# Altium PCB VideoMuxBoard.PcbDoc (part 2 of 2)
Units mil, origin at the board's own origin, x right, y up, seen from the top; angles counter-clockwise.
Board outline 4724.41 x 4724.41 mil, 4 copper layers (Top Layer, Ground, MidLayer1, Bottom Layer); 247 components, 183 nets, 999 pads, 433 vias.
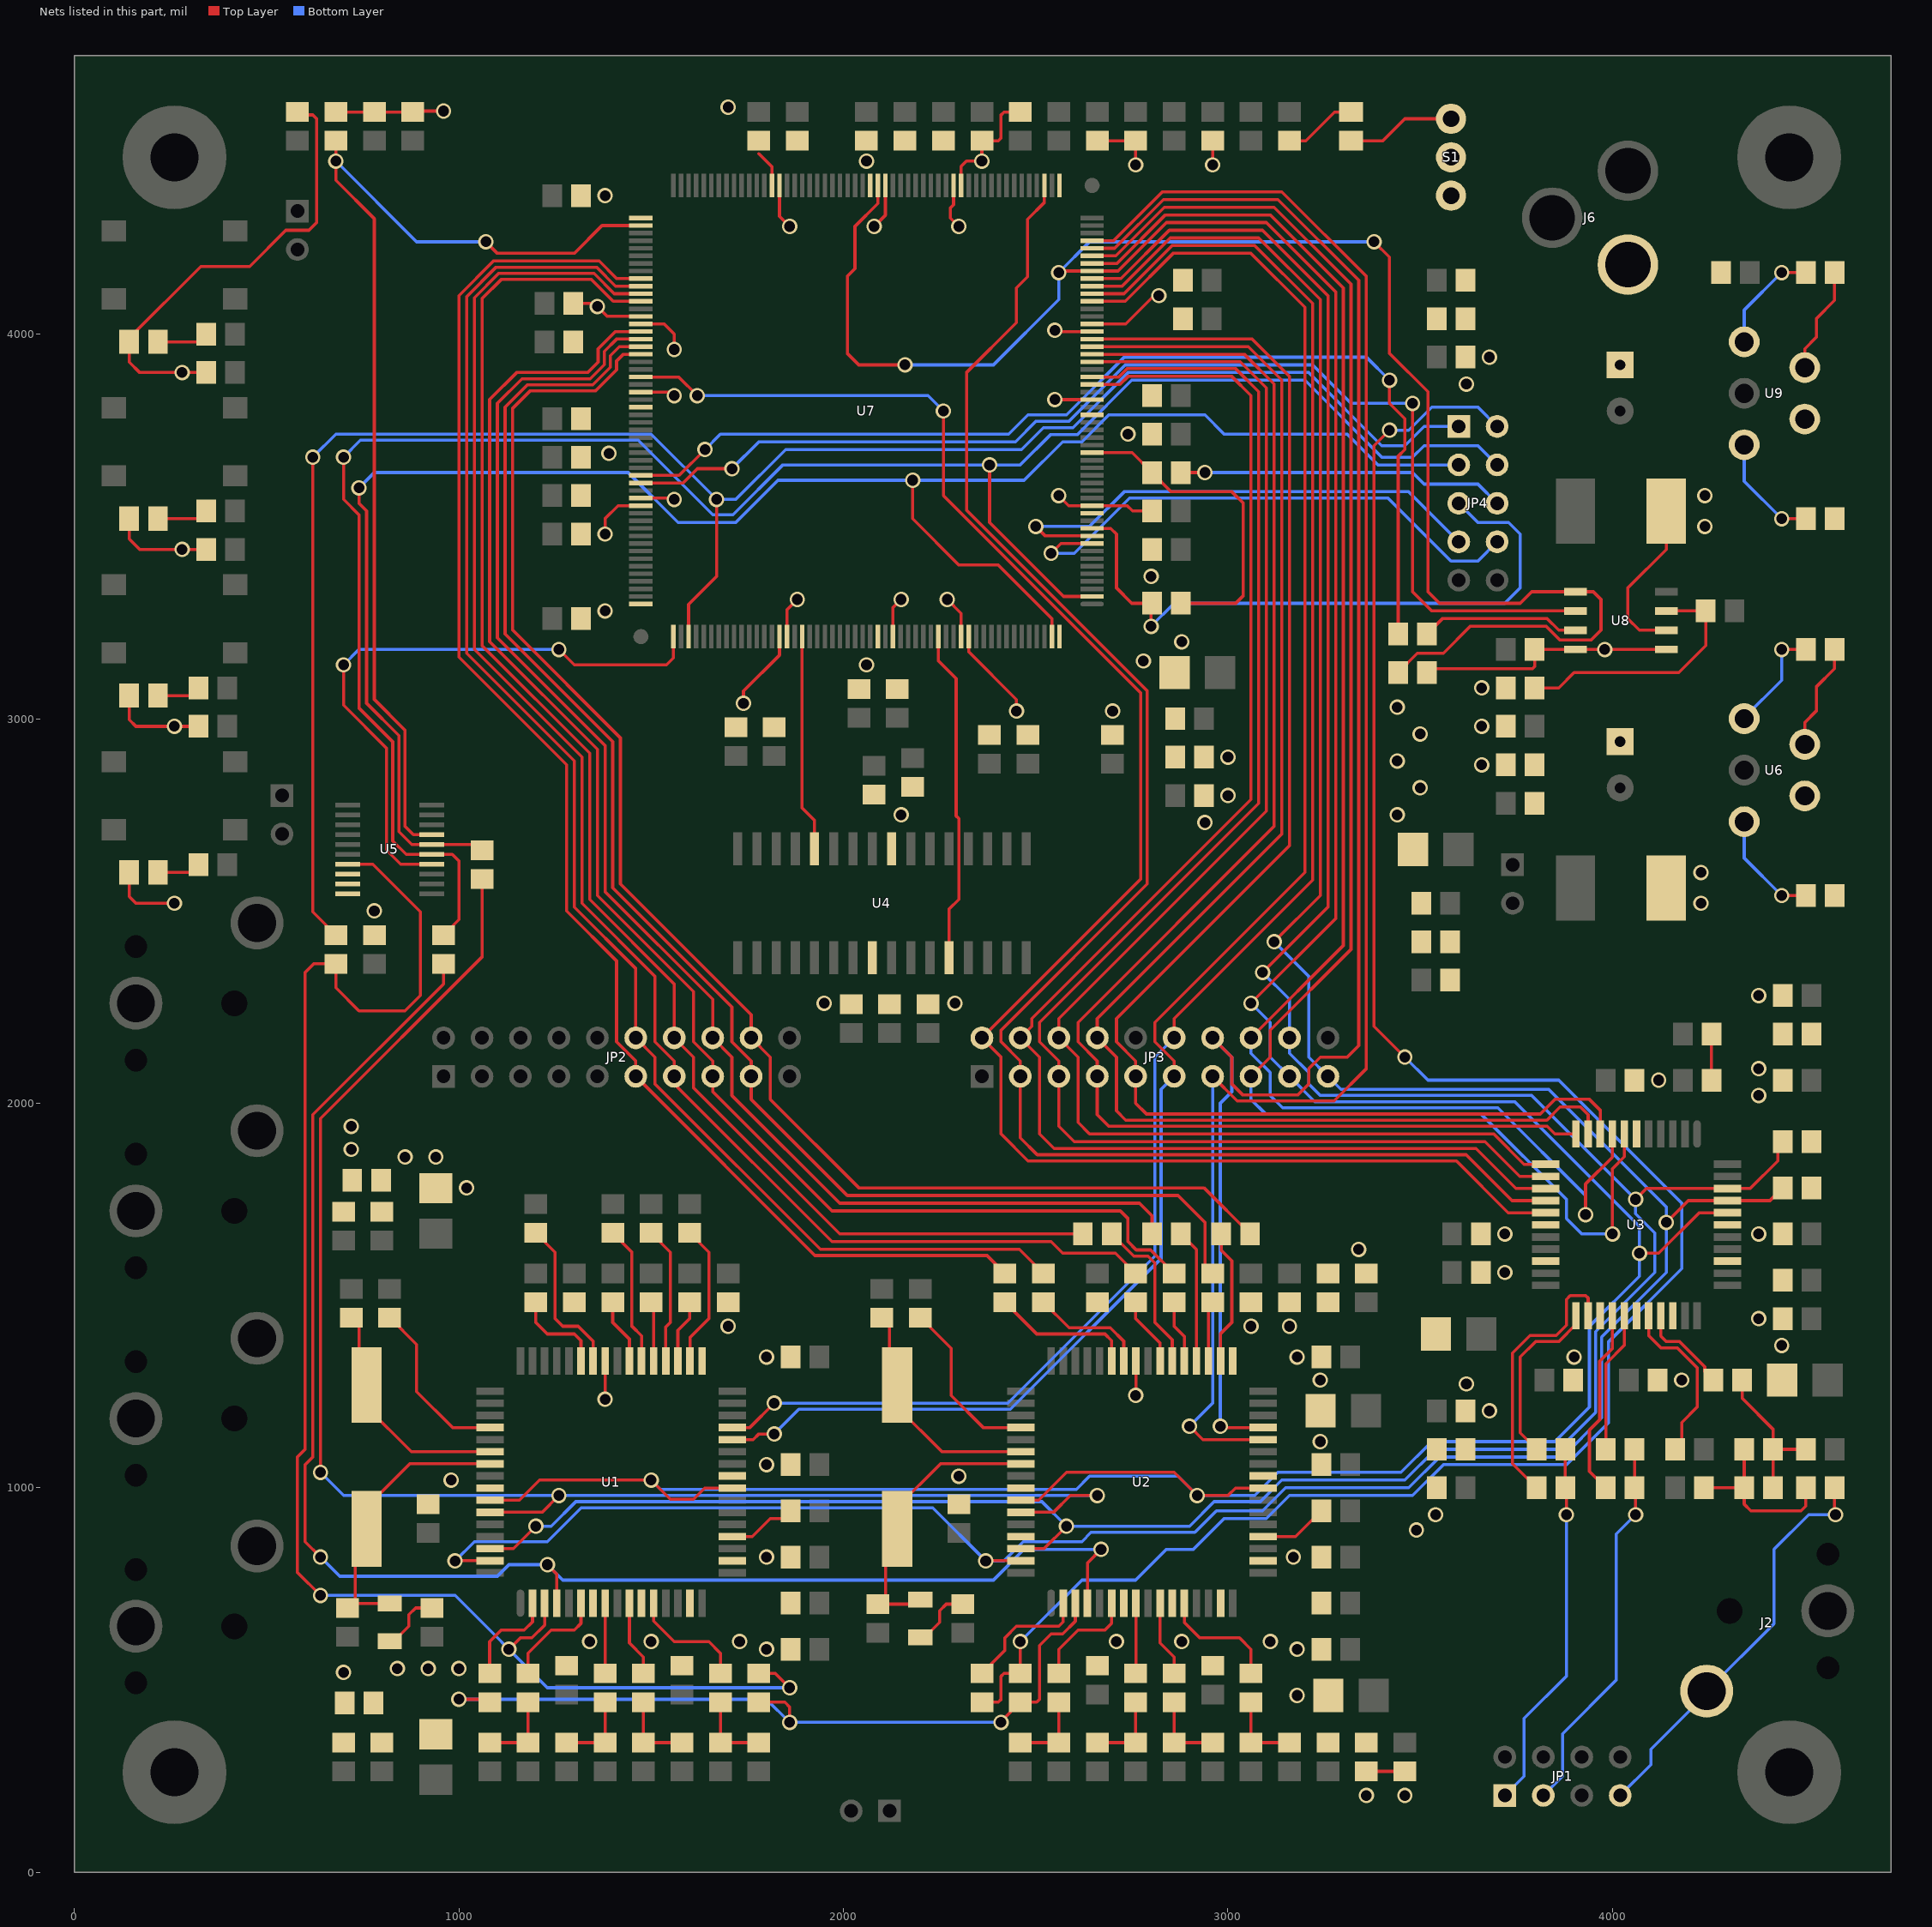
[diagram p4: the nets of this part, all layers, seen from the top]

## Via types
v1: diameter 40, hole 28, Top Layer to Bottom Layer, 433 vias

## Nets (pads, with @x,y where several pads share a name; then routed paths per layer and width w, separated by ;. In a path a pad name is that pad's centre, name@x,y a point inside that pad or via, vN(x,y) a via of type N, cw(c..) or ccw(c..) an arc to the next point about the centre after c; other vN are vias at no path point) (continued)
MPB0: JP2.11 R35.1 U7.113 | length 3922.4
  Top Layer w8: U7.113@1473.36,4144.46 1410,4144.46 1364.46,4190 1090,4190 1000,4100 1000,3160 1280,2880 1280,2500 1410,2370 1410,2160 1460,2110 JP2.11@1460,2070 1926,1604 2373.4,1604 R35.1@2420,1557.4
MPB1: JP2.12 R36.1 U7.114 | length 3969.9
  Top Layer w8: U7.114@1473.36,4124.78 1407.06,4124.78 1357.84,4174 1096.63,4174 1020,4097.37 1020,3170 1300,2890 1300,2510 1460,2350 JP2.12@1460,2170 1510,2120 1510,2050 1940,1620 2457.4,1620 R36.1@2520,1557.4
MPB2: JP2.13 R37.1 U7.115 | length 4150.9
  Top Layer w8: U7.115@1473.36,4105.09 1404.12,4105.09 1351.21,4158 1103.25,4158 1040,4094.75 1040,3180 1320,2900 1320,2520 1510,2330 1510,2160 1560,2110 JP2.13@1560,2070 ; JP2.13@1565.25,2070 JP2.13@1560,2070 ; R37.1@2760,1557.4 2707.4,1610 2570,1610 2540,1640 1970,1640 1560,2050 JP2.13@1560,2070
MPB3: JP2.14 R44.1 U7.116 | length 3907.4
  Top Layer w8: U7.116@1473.36,4085.41 1401.17,4085.41 1344.58,4142 1109.88,4142 1060,4092.12 1060,3190 1340,2910 1340,2530 1560,2310 JP2.14@1560,2170 1610,2120 1610,2040 1990,1660 R44.1@2622.6,1660
MPB4: JP2.15 R38.1 U7.120 | length 3958
  Top Layer w8: U7.120@1473.36,4006.67 1406.67,4006.67 1362,3962 1362,3927.25 1334.75,3900 1150,3900 1080,3830 1080,3200 1360,2920 1360,2540 1610,2290 1610,2160 1660,2110 JP2.15@1660,2070 1660,2030 1970,1720 2720,1720 2740,1700 2740,1640.03 2761.56,1618.47 2798.93,1618.47 R38.1@2860,1557.4
MPB5: JP2.16 R45.1 U7.121 | length 3784.8
  Top Layer w8: U7.121@1473.36,3986.98 1410,3986.98 1378,3954.98 1378,3920.63 1341.37,3884 1164,3884 1100,3820 1100,3210 1380,2930 1380,2550 1660,2270 JP2.16@1660,2170 1710,2120 1710,2020 1990,1740 2770,1740 2802.6,1707.4 R45.1@2802.6,1660
MPB6: JP2.17 R39.1 U7.122 | length 3954.6
  Top Layer w8: U7.122@1473.36,3967.3 1417.3,3967.3 1394,3944 1394,3914 1348,3868 1178,3868 1120,3810 1120,3220 1400,2940 1400,2560 1710,2250 1710,2160 1760,2110 JP2.17@1760,2070 1760,2010 2010,1760 2870,1760 2940,1690 2940,1577.4 R39.1@2960,1557.4
MPB7: JP2.18 R46.1 U7.123 | length 3872.4
  Top Layer w8: 1354.63,3853.44 1354.63,3852 1184.63,3852 1140,3807.37 1140,3230 1420,2950 1420,2570 1760,2230 JP2.18@1760,2170 1810,2120 1810,2010 2040,1780 2937.4,1780 R46.1@3057.4,1660 ; 1355.35,3852.72 1410,3907.37 1410,3930 1427.61,3947.61 U7.123@1473.36,3947.61
MPOUT0: JP3.2 U3.16 U7.126 | length 4609.1
  Top Layer w8: U7.126@1473.36,3888.56 1571.44,3888.56 v1(1620,3840) ; v1(2260,3800) 2260,3580 2773.5,3066.5 2773.5,2583.5 JP3.2@2360,2170 2410,2120 2410,1920 2480,1850 3594.14,1850 3728.87,1715.28 U3.16@3826.3,1715.27
  Bottom Layer w8: v1(1620,3840) 2220,3840 v1(2260,3800)
MPOUT1: JP3.3 U3.15 U7.55 | length 4367.2
  Top Layer w8: U7.55@2522.57,4386.59 2522.58,4342.58 2478.76,4298.76 2478.76,4148.76 2450,4120 2450,4030 2320,3900 2320,3542.63 2790,3072.63 2790,2570 2410,2190 2410,2160 2460,2110 JP3.3@2460,2070 2460,1910 2504,1866 3619.64,1866 3738.87,1746.77 U3.15@3826.3,1746.77
MPOUT2: JP3.4 U3.14 U7.30 | length 4007.1
  Top Layer w8: U7.30@2646.59,3868.87 2718.87,3868.87 2740,3890 3010,3890 3060,3840 3060,2790 2490,2220 2490,2200 JP3.4@2460,2170 2510,2120 2510,1920 2548,1882 3645.14,1882 3748.87,1778.27 U3.14@3826.3,1778.27
MPOUT3: JP3.5 U3.13 U7.31 | length 3954.2
  Top Layer w8: U7.31@2646.59,3888.56 2715.93,3888.56 2737.37,3910 3020,3910 3080,3850 3080,2780 2510,2210 2510,2160 2560,2110 JP3.5@2560,2070 2560,1940 2600,1900 3668.63,1900 3758.87,1809.76 U3.13@3826.3,1809.76
MPOUT4: JP3.6 U3.12 U7.33 | length 3897.3
  Top Layer w8: U7.33@2646.59,3927.93 3032.07,3927.93 3100,3860 3100,2760 2560,2220 JP3.6@2560,2170 2610,2120 2610,1950 2640,1920 3691.26,1920 3770,1841.26 U3.12@3826.3,1841.26
MPOUT5: JP3.7 U3.11 U7.34 | length 3903.3
  Top Layer w8: U7.34@2646.59,3947.61 3042.39,3947.61 3120,3870 3120,2720 2610,2210 2610,2160 2660,2110 JP3.7@2660,2070 2660,1970 2690,1940 3830,1940 3850,1920 U3.11@3905.04,1920
MPOUT6: JP3.8 U3.10 U7.35 | length 3957.9
  Top Layer w8: U7.35@2646.59,3967.3 3052.7,3967.3 3140,3880 3140,2700 2660,2220 JP3.8@2660,2170 2710,2120 2710,1980 2734,1956 3829.48,1956 3863.48,1990 3916.54,1990 3936.54,1970 U3.10@3936.53,1920
MPOUT7: JP3.9 U3.9 U7.36 | length 3959.6
  Top Layer w8: U7.36@2646.59,3986.98 3063.02,3986.98 3160,3890 3160,2670 2710,2220 2710,2160 2760,2110 JP3.9@2760,2070 2760,2000 2788,1972 3812,1972 3850,2010 3940,2010 3968.03,1981.97 U3.9@3968.03,1920
NetC3_1: C3.1 R9.2 R11.2 | length 205.2
  Top Layer w8: R9.2@2460,337.4 R11.2@2560,337.4 C3.1@2560,442.6
NetC3_2: C3.2 U2.6 | length 280.5
  Top Layer w8: C3.2@2560,517.4 2560,580 2610,630 2680,630 2697.48,647.48 U2.6@2697.48,700
NetC5_1: C5.1 R12.2 R13.2 | length 205.2
  Top Layer w8: R12.2@2660,337.4 R13.2@2760,337.4 C5.1@2760,442.6
NetC5_2: C5.2 U2.8 | length 182.8
  Top Layer w8: C5.2@2760,517.4 2760.47,517.88 U2.8@2760.47,700
NetC6_1: C6.1 R14.2 R15.2 | length 205.2
  Top Layer w8: C6.1@2860,442.6 R14.2@2860,337.4 R15.2@2960,337.4
NetC6_2: C6.2 U2.10 | length 197.7
  Top Layer w8: U2.10@2823.47,700 2823.46,596.54 2860,560 C6.2@2860,517.4
NetC8_1: C8.1 R16.2 R17.2 | length 205.2
  Top Layer w8: C8.1@3060,442.6 R16.2@3060,337.4 R17.2@3160,337.4
NetC8_2: C8.2 U2.12 | length 315.1
  Top Layer w8: U2.12@2886.46,700 2886.46,650 2926.46,610 3030,610 3060,580 C8.2@3060,517.4
NetC12_1: C12.1 R1.2 R2.2 | length 205.2
  Top Layer w8: R1.2@1080,337.4 R2.2@1180,337.4 C12.1@1180,442.6
NetC12_2: C12.2 U1.6 | length 274.7
  Top Layer w8: C12.2@1180,517.4 1180,570 1240,630 1300,630 1317.48,647.48 U1.6@1317.48,700
NetC14_1: C14.1 R3.2 R4.2 | length 205.2
  Top Layer w8: R3.2@1280,337.4 R4.2@1380,337.4 C14.1@1380,442.6
NetC14_2: C14.2 U1.8 | length 182.1
  Top Layer w8: C14.2@1380.47,517.88 U1.8@1380.47,700
NetC15_1: C15.1 R5.2 R6.2 | length 205.2
  Top Layer w8: C15.1@1480,442.6 R5.2@1480,337.4 R6.2@1580,337.4
NetC15_2: C15.2 U1.10 | length 197.7
  Top Layer w8: U1.10@1443.47,700 1443.46,596.54 1480,560 C15.2@1480,517.4
NetC17_1: C17.1 R7.2 R8.2 | length 205.2
  Top Layer w8: C17.1@1680,442.6 R7.2@1680,337.4 R8.2@1780,337.4
NetC17_2: C17.2 U1.12 | length 307.2
  Top Layer w8: U1.12@1506.46,700 1506.46,653.54 1560,600 1650,600 1680,570 C17.2@1680,517.4
NetC20_2: C20.2 L4.2 U2.55 X2.1 | length 755.9
  Top Layer w8: L4.2@2200,709.21 2188.19,697.4 C20.2@2090,697.4 2110,717.4 2110,862.99 X2.1@2140,892.99 2140,950 2252.2,1062.2 U2.55@2461.26,1062.2
NetC21_2: C21.2 L4.1 | length 163.5
  Top Layer w8: L4.1@2200,610.79 2210.79,610.79 2250,650 2250,680 2267.4,697.4 C21.2@2310,697.4
NetC22_2: C22.2 L3.2 U1.55 X1.1 | length 749.2
  Top Layer w8: C22.2@710,687.4 C22.2@721.81,699.21 ; L3.2@820,699.21 C22.2@721.81,699.21 ; U1.55@1081.26,1062.2 872.2,1062.2 760,950 X1.1@760,892.99 730,862.99 730,707.4 C22.2@721.81,699.21
NetC23_2: C23.2 L3.1 | length 163.5
  Top Layer w8: L3.1@820,600.79 830.79,600.79 870,640 870,670 887.4,687.4 C23.2@930,687.4
NetC33_1: C33.1 C34.2 L5.1 L7.2 | length 467.6
  Top Layer w8: C33.1@4237.4,1000 C34.2@4342.6,1000 ; L7.2@4342.6,1100 C34.2@4342.6,1000 ; L5.1@4502.6,1000 4502.6,952.6 4490,940 4360,940 4342.6,957.4 C34.2@4342.6,1000
NetC42_1: C42.1 U1.54 X1.2 | length 618.6
  Top Layer w8: C42.1@720,1442.6 740,1422.6 740,1287.01 X1.2@760,1267.01 760,1210 876.3,1093.7 U1.54@1081.26,1093.7
NetC49_1: C49.1 U2.54 X2.2 | length 618.6
  Top Layer w8: C49.1@2100,1442.6 2120,1422.6 2120,1287.01 X2.2@2140,1267.01 2140,1210 2256.3,1093.7 U2.54@2461.26,1093.7
NetC67_1: C67.1 R49.2 | length 120
  Top Layer w8: R49.2@4257.4,2060 C67.1@4257.4,2180
NetC79_1: C79.1 C80.1 L13.2 R60.2 U6.2 | length 279
  Top Layer w8: U6.2@4500,2933.07 4500,2990 4530,3020 4530,3082.6 4577.4,3130 R60.2@4577.4,3180
NetC96_1: C96.1 C106.1 L14.2 R69.2 U9.2 | length 279
  Top Layer w8: U9.2@4500,3913.07 4500,3962 4530,3992 4530,4040 4577.4,4087.4 R69.2@4577.4,4160
NetJ2_1: J2.1 JP1.7 L5.2 | length 1070.4
  Top Layer w8: v1@4577.4,932.6 L5.2@4577.4,1000
  Bottom Layer w8: JP1.7@4020,200 4100,280 4100,320 4245.04,465.04 J2.1@4245.04,471.34 4420,646.3 4420,840 4510,930 v1(4580,930)
NetJP4_6: JP4.6 R66.2 | length 855.7
  Top Layer w8: R66.2@2877.4,3640 v1(2940,3640)
  Bottom Layer w8: v1(2940,3640) 3480,3640 3510,3610 3650,3610 JP4.6@3700,3560
NetLED1_2: LED1.2 R53.1 | length 113.5
  Top Layer w8: LED1.2@217.4,2600 302.6,2600 R53.1@322.6,2620
NetLED2_2: LED2.2 R56.1 | length 113.5
  Top Layer w8: LED2.2@217.4,3060 302.6,3060 R56.1@322.6,3080
NetLED3_2: LED3.2 R65.1 | length 133.5
  Top Layer w8: LED3.2@217.4,3520 322.6,3520 R65.1@342.6,3540
NetLED4_2: LED4.2 R68.1 | length 133.5
  Top Layer w8: LED4.2@217.4,3980 322.6,3980 R68.1@342.6,4000
NetLED5_2: LED5.2 R77.1 | length 191
  Top Layer w8: R77.1@3160,4502.6 3202.6,4502.6 3277.4,4577.4 LED5.2@3320,4577.4
NetR18_2: R19.2 U2.2 | length 334.6
  Top Layer w8: R19.2@2360,517.4 2420,577.4 2420,610 2450,640 2560,640 2571.5,651.5 U2.2@2571.5,700
NetR19_2: R18.2 U1.2 | length 263.9
  Top Layer w8: R18.2@1080,517.4 1080,600 1110,630 1170,630 1191.5,651.5 U1.2@1191.5,700
NetR21_2: R21.2 U1.20 | length 179.1
  Top Layer w8: U1.20@1711.18,873.23 1763.23,873.23 1810,920 1842.6,920 R21.2@1862.6,940
NetR22_2: R22.2 U2.20 | length 179.1
  Top Layer w8: U2.20@3091.18,873.23 3175.83,873.23 R22.2@3242.6,940
NetR23_1: R23.1 U3.24 | length 722.8
  Top Layer w8: R23.1@3802.6,1000 3740,1062.6 3740,1350 3785.87,1395.87 3853.42,1395.87 3880,1422.45 3880,1490 3890,1500 3930,1500 3936.53,1493.47 U3.24@3936.53,1447.56
NetR24_1: R24.1 U3.26 | length 489.9
  Top Layer w8: R24.1@3982.6,1000 3940,1042.6 3940,1150 3966.72,1176.72 3966.72,1329.17 3999.53,1361.98 U3.26@3999.53,1447.56
NetR25_1: R25.1 U3.23 | length 460.4
  Top Layer w8: R25.1@3802.6,1100 3760,1142.6 3760,1340 3800,1380 3860,1380 3905.04,1425.04 U3.23@3905.04,1447.56
NetR26_1: R26.1 U3.27 | length 367.6
  Top Layer w8: R26.1@3982.6,1100 3982.6,1322.6 4031.02,1371.02 U3.27@4031.02,1447.56
NetR27_1: R27.1 U3.29 | length 448.4
  Top Layer w8: U3.29@4094.02,1447.56 4094.02,1395.98 4125.87,1364.13 4168.32,1364.13 4220,1312.45 4220,1210 4180,1170 4180,1117.4 R27.1@4162.6,1100
NetR28_1: R28.1 U3.30 | length 244.8
  Top Layer w8: U3.30@4125.51,1447.56 4125.51,1394.49 4140,1380 4174.9,1380 4240,1314.9 4240,1302.6 R28.1@4262.6,1280
NetR29_2: R29.2 U1.52 | length 451.5
  Top Layer w8: R29.2@820,1442.6 890,1372.6 890,1250 983.31,1156.69 U1.52@1081.26,1156.69
NetR30_2: R30.2 U1.43 | length 242.3
  Top Layer w8: R30.2@1200,1482.6 1200,1430 1230,1400 1300,1400 1317.48,1382.52 U1.43@1317.48,1329.92
NetR31_2: R31.2 U1.39 | length 170.7
  Top Layer w8: R31.2@1400,1482.6 1400,1430 1443.46,1386.54 U1.39@1443.47,1329.92
NetR32_2: R32.2 U1.37 | length 155.4
  Top Layer w8: R32.2@1500,1482.6 1506.46,1476.14 U1.37@1506.46,1329.92
NetR33_2: R33.2 U1.35 | length 165.3
  Top Layer w8: U1.35@1569.45,1329.92 1569.45,1409.45 1600,1440 R33.2@1600,1482.6
NetR34_2: R34.2 U2.52 | length 451.5
  Top Layer w8: R34.2@2200,1442.6 2280,1362.6 2280,1240 2363.31,1156.69 U2.52@2461.26,1156.69
NetR35_2: R35.2 U2.43 | length 371.5
  Top Layer w8: R35.2@2420,1482.6 2502.6,1400 2680,1400 2697.48,1382.52 U2.43@2697.48,1329.92
NetR36_2: R36.2 U2.42 | length 302.2
  Top Layer w8: R36.2@2520,1482.6 2586.6,1416 2694,1416 2728.98,1381.02 U2.42@2728.98,1329.92
NetR37_2: R37.2 U2.39 | length 179
  Top Layer w8: R37.2@2760,1482.6 2760,1440 2823.46,1376.54 U2.39@2823.47,1329.92
NetR38_2: R38.2 U2.37 | length 163.6
  Top Layer w8: R38.2@2860,1482.6 2860,1420 2886.46,1393.54 U2.37@2886.46,1329.92
NetR39_2: R39.2 U2.35 | length 157
  Top Layer w8: U2.35@2949.45,1329.92 2949.45,1472.05 R39.2@2960,1482.6
NetR40_2: R40.2 U1.42 | length 417.8
  Top Layer w8: R40.2@1200,1662.6 1250,1612.6 1250,1440 1270,1420 1310,1420 1348.98,1381.02 U1.42@1348.98,1329.92
NetR41_2: R41.2 U1.38 | length 363.7
  Top Layer w8: R41.2@1400,1662.6 1450,1612.6 1450,1420 1474.96,1395.04 U1.38@1474.96,1329.92
NetR42_2: R42.2 U1.36 | length 358.4
  Top Layer w8: R42.2@1500,1662.6 1550,1612.6 1550,1430 1537.95,1417.95 U1.36@1537.95,1329.92
NetR43_2: R43.2 U1.34 | length 373.7
  Top Layer w8: R43.2@1600,1662.6 1650,1612.6 1650,1440 1600.95,1390.94 U1.34@1600.95,1329.92
NetR44_2: R44.2 U2.38 | length 417.2
  Top Layer w8: R44.2@2697.4,1660 2754.93,1602.47 2792.3,1602.47 2810,1584.77 2810,1430 2854.96,1385.04 U2.38@2854.96,1329.92
NetR45_2: R45.2 U2.36 | length 346.9
  Top Layer w8: R45.2@2877.4,1660 2917.95,1619.45 U2.36@2917.95,1329.92
NetR46_2: R46.2 U2.34 | length 353.5
  Top Layer w8: U2.34@2980.94,1329.92 2980.94,1400.94 3010,1430 3010,1590 2982.6,1617.4 R46.2@2982.6,1660
NetR52_1: R52.1 U6.5 | length 295.3
  Top Layer w8: v1(4440,2540) R52.1@4502.6,2540
  Bottom Layer w8: U6.5@4342.52,2732.28 4342.52,2637.48 v1(4440,2540)
NetR58_2: R58.2 R62.1 U8.3 | length 683.4
  Top Layer w8: R58.2@3797.4,3080 3860,3080 3900,3120 4172.6,3120 4242.6,3190 R62.1@4242.6,3280 U8.3@4140,3280
NetR59_2: R59.2 U8.7 | length 415.4
  Top Layer w8: R59.2@3517.4,3220 3557.4,3260 3830,3260 3860,3230 U8.7@3903.78,3230
NetR60_1: R60.1 U6.1 | length 286.5
  Top Layer w8: v1(4440,3180) R60.1@4502.6,3180
  Bottom Layer w8: U6.1@4340,3000 4341.26,3001.26 U6.1@4342.52,3002.52 ; U6.1@4342.52,3000 U6.1@4342.52,3002.52 ; v1(4440,3180) 4440,3100 U6.1@4342.52,3002.52
NetR64_1: R64.1 U9.5 | length 295.3
  Top Layer w8: v1(4440,3520) R64.1@4502.6,3520
  Bottom Layer w8: U9.5@4342.52,3712.28 4342.52,3617.48 v1(4440,3520)
NetR69_1: R69.1 U9.1 | length 283
  Top Layer w8: v1(4440,4160) R69.1@4502.6,4160
  Bottom Layer w8: U9.1@4342.52,3980 4342.52,4062.52 v1(4440,4160)
OEBAR: U4.28 U7.174 | length 565
  Top Layer w8: U7.174@1892.65,3213.36 1892.65,2767.35 1925,2735 U4.28@1925,2661.73
POS1_8V: C78.1 C92.1 L12.1 R64.2 U8.2 U9.4 | length 433.8
  Top Layer w8: U8.2@4140,3230 4070,3230 4040,3260 4040,3340 4140,3440 C92.1@4140,3540
  other v1: 2940,2730 3000,2800 3000,2900 4240,3500 4240,3580
POS3_3V: C10.1 C11.1 C32.1 C53.1 C56.1 C68.1 C69.1 C71.1 C88.1 L1.1 L2.1 L6.1 L8.1 L9.1 L10.1 L11.1 LED1.1 LED2.1 LED3.1 LED4.1 R52.2 R55.1 R57.2 R63.1 R67.1 R78.1 U6.4 U8.1 U8.8 | length 2687.4
  Top Layer w8: LED1.1@142.6,2600 142.6,2537.4 160,2520 v1(260,2520) ; LED2.1@142.6,3060 142.6,2997.4 160,2980 v1(260,2980) R55.1@322.6,2980 ; LED3.1@142.6,3520 142.6,3467.4 170,3440 v1(280,3440) R63.1@342.6,3440 ; R67.1@342.6,3900 v1(280,3900) 170,3900 142.6,3927.4 LED4.1@142.6,3980 142.6,3990 328.6,4176 456,4176 550,4270 610,4270 630,4290 630,4560 620,4570 587.4,4570 R78.1@580,4577.4 ; L1.1@3360,262.6 C10.1@3460,262.6 ; R57.2@3517.4,3120 3527.4,3130 3792,3130 3797.4,3135.4 C88.1@3797.4,3180 U8.8@3903.78,3180 v1(3980,3180) U8.1@4140,3180
  other v1: 3360,200 3460,200 700,520 3490,890 3540,930 3340,1620 720,1880 720,1940 4380,2280 4230,2520 4230,2600
POS5V: C86.1 C101.1 L13.1 L14.1 LED5.1 R58.1 S1.3 | length 283.8
  Top Layer w8: LED5.1@3320,4502.6 3402.6,4502.6 3460,4560 S1.3@3580,4560
  other v1: 3660,2880 3660,2980 3660,3080 3620,3870 3680,3940
PROGRAM: R70.2 U5.7 U7.106 | length 2858.1
  Top Layer w8: R70.2@680,4502.6 v1(680,4450) 680,4400 780,4300 780,3050 860,2970 860,2720 881.61,2698.39 U5.7@929.25,2698.39 ; v1(1070,4240) 1100,4210 1300,4210 1372.26,4282.26 U7.106@1473.36,4282.26
  Bottom Layer w8: v1(680,4450) 890,4240 v1(1070,4240)
PWR_IN: C104.1 J6.1 S1.1 S1.2 | length 29.2
  Top Layer w40: J6.1@4040,4180.63 J6.1@4060.63,4160
PWRGOOD: U7.140 U8.6 | length 3109.7
  Top Layer w8: U7.140@1473.36,3612.97 1582.97,3612.97 1620,3650 v1(1710,3650) ; v1(3480,3820) 3480,3330 3530,3280 U8.6@3903.78,3280
  Bottom Layer w8: v1(1710,3650) 1780,3720 2447.18,3720 2500,3772.82 2585.45,3772.82 2732.63,3920 3220,3920 3320,3820 v1(3480,3820)
RCV1: JP3.15 U3.7 U7.47 | length 4423.5
  Top Layer w8: U7.47@2646.59,4203.52 2708.26,4203.52 2834.74,4330 3120,4330 3320,4130 3320,2400 3110,2190 3110,2120 JP3.15@3060,2070 ; v1(4000,1660) 4000,1830 4031.02,1861.02 U3.7@4031.02,1920
  Bottom Layer w8: JP3.15@3060,2070 3060,2010 3098,1972 3658,1972 3880,1750 3880,1700 3920,1660 v1(4000,1660)
RCV2: JP3.16 U3.8 U7.46 | length 4221
  Top Layer w8: U7.46@2646.59,4183.83 2711.21,4183.83 2837.37,4310 3110,4310 3300,4120 3300,2410 JP3.16@3060,2170 ; v1(3930,1710) 3930,1790 3999.53,1859.53 U3.8@3999.53,1920
  Bottom Layer w8: JP3.16@3060,2170 3060,2130 3110,2080 3110,2020 3142,1988 3702,1988 3930,1760 v1(3930,1710)
RESETBAR: JP3.17 R57.1 U1.24 U1.58 U2.24 U2.58 U3.40 U7.45 U7.77 U8.5 | length 13004.3
  Top Layer w8: U1.58@1081.26,967.72 1157.72,967.72 1210,1020 v1(1500,1020) 1550,970 1610,970 1639.21,999.21 U1.24@1711.18,999.21 ; U7.77@2089.5,4386.59 2089.5,4339.5 2030,4280 2030,4170 2010,4150 2010,3950 2040,3920 v1(2160,3920) ; U2.58@2461.26,967.72 2507.72,967.72 2580,1040 2860,1040 v1(2920,980) 3000,980 3019.21,999.21 U2.24@3091.18,999.21 ; v1(2560,4160) 2564.15,4164.15 U7.45@2646.59,4164.15 2714.15,4164.15 2840,4290 3100,4290 3280,4110 3280,2480 v1(3060,2260) ; v1(3380,4240) 3420,4200 3420,3950 3520,3850 3520,3330 3550,3300 3760,3300 3790,3330 U8.5@3903.78,3330 3950,3330 3970,3310 3970,3230 3945,3205 3862.55,3205 3827.55,3240 3630,3240 3560,3170 3492.6,3170 R57.1@3442.6,3120 ; v1(4070,1610) 4120,1610 4225.27,1715.27 U3.40@4298.74,1715.27
  Bottom Layer w8: v1(1500,1020) 1524,996 2606,996 2640,1030 2870,1030 v1(2920,980) 3070,980 3130,1040 3450,1040 3530,1120 3850,1120 3940,1210 3940,1420 4070,1550 v1(4070,1610) 4070,1680 3746,2004 3226,2004 JP3.17@3160,2070 3110,2120 3110,2210 v1(3060,2260) ; v1(2160,3920) 2390,3920 2560,4090 v1(2560,4160) 2640,4240 v1(3380,4240)
RTSA0: JP3.11 U1.28 U7.41 | length 4643.2
  Top Layer w8: U1.28@1711.18,1125.2 1765.2,1125.2 1780,1140 v1(1820,1140) ; U7.41@2646.59,4085.41 2732.78,4085.41 2857.37,4210 3060,4210 3200,4070 3200,2600 2810,2210 2810,2160 2860,2110 JP3.11@2860,2070
  Bottom Layer w8: v1(1820,1140) 1884,1204 2434,1204 2826,1596 2826,2036 JP3.11@2860,2070
RTSA1: JP3.12 U1.29 U7.42 | length 4618
  Top Layer w8: U1.29@1711.18,1156.69 1756.69,1156.69 v1(1820,1220) ; U7.42@2646.59,4105.09 2729.84,4105.09 2854.75,4230 3070,4230 3220,4080 3220,2580 2860,2220 JP3.12@2860,2170
  Bottom Layer w8: v1(1820,1220) 2427.37,1220 2810,1602.63 2810,2120 JP3.12@2860,2170
RTSB0: JP3.13 U2.28 U7.49 | length 4518.9
  Top Layer w8: U7.49@2646.59,4242.89 2702.38,4242.89 2829.49,4370 3140,4370 3360,4150 3360,2090 3276,2006 3024,2006 JP3.13@2960,2070 ; v1(2900,1160) 2934.8,1125.2 U2.28@3091.18,1125.2
  Bottom Layer w8: v1(2900,1160) 2960,1220 JP3.13@2960,2070
RTSB1: JP3.14 U2.29 U7.48 | length 4537.4
  Top Layer w8: U7.48@2646.59,4223.2 2705.32,4223.2 2832.12,4350 3130,4350 3340,4140 3340,2150 3310,2120 3240,2120 3210,2090 3210,2050 3182,2022 3038,2022 3010,2050 3010,2120 JP3.14@2960,2170 ; v1(2980,1160) 2983.31,1156.69 U2.29@3091.18,1156.69
  Bottom Layer w8: JP3.14@2960,2170 3010,2120 3010,2030 2980,2000 v1(2980,1160)
SCL: JP3.19 R47.1 U1.63 U2.63 U3.41 U7.43 | length 8250.7
  Top Layer w8: v1(990,810) 990.24,810.24 U1.63@1081.26,810.24 ; v1(2370,810) 2370.24,810.24 U2.63@2461.26,810.24 ; U7.43@2646.59,4124.78 2724.78,4124.78 2850,4250 3080,4250 3240,4090 3240,2540 v1(3120,2420) ; v1(4140,1690) 4196.77,1746.77 U3.41@4298.74,1746.77 4409.37,1746.77 R47.1@4442.6,1780
  Bottom Layer w8: v1(990,810) 1040,860 1230,860 1318,948 2232,948 v1(2370,810) 2417.37,810 2467.37,860 2620,860 2644,884 2914,884 2970,940 3090,940 3150,1000 3470,1000 3550,1080 3870,1080 3972,1182 3972,1392 4140,1560 v1(4140,1690) 4140,1730 3834,2036 3294,2036 JP3.19@3260,2070 3210,2120 3210,2330 v1(3120,2420)
SDA: JP3.18 R48.1 U1.62 U2.62 U3.42 U7.44 | length 8202.7
  Top Layer w8: U1.62@1081.26,841.73 1141.73,841.73 v1(1200,900) ; U2.62@2461.26,841.73 2521.73,841.73 v1(2580,900) ; U7.44@2646.59,4144.46 2721.84,4144.46 2847.37,4270 3090,4270 3260,4100 3260,2510 v1(3090,2340) ; v1(4060,1750) 4088.27,1778.27 U3.42@4298.74,1778.27 4358.27,1778.27 4430,1850 4430,1887.4 R48.1@4442.6,1900
  Bottom Layer w8: v1(1200,900) 1240,900 1304,964 2516,964 v1(2580,900) 2900,900 2964,964 3084,964 3140,1020 3460,1020 3540,1100 3860,1100 3956,1196 3956,1406 4110,1560 4110,1662.63 4060,1712.63 v1(4060,1750) 3790,2020 3240,2020 3210,2050 3210,2080 3160,2130 JP3.18@3160,2170 3160,2270 v1(3090,2340)
TCK: R54.2 U1.59 U2.59 | length 4175.2
  Top Layer w8: v1(640,1040) 640,1960 1060,2380 R54.2@1060,2582.6 ; U1.59@1081.26,936.22 1216.22,936.22 v1(1260,980) ; U2.59@2461.26,936.22 2546.22,936.22 2590,980 v1(2660,980)
  Bottom Layer w8: v1(640,1040) 700,980 v1(2660,980)
TCK_HARD: JP4.3 R54.1 U5.6 U7.207 | length 4890
  Top Layer w8: v1(740,3600) 740,3560 760,3540 760,3040 844,2956 844,2706 877.2,2672.8 U5.6@929.25,2672.8 1044.61,2672.8 R54.1@1060,2657.4 ; v1(2180,3620) 2180,3520 2300.65,3399.35 2402.91,3399.35 2542.26,3260 U7.207@2542.26,3213.36
  Bottom Layer w8: v1(740,3600) 780,3640 1440,3640 1570,3510 1720,3510 1830,3620 2470,3620 2570,3720 2620,3720 2690,3790 2940,3790 2990,3740 3310,3740 3390,3660 JP4.3@3600,3660
TCK_SOFT: JP4.7 U7.10 | length 1348
  Top Layer w8: v1(2500,3500) 2524.83,3475.17 U7.10@2646.59,3475.17
  Bottom Layer w8: v1(2500,3500) 2640,3500 2730,3590 3470,3590 JP4.7@3600,3460
TDI_B: R10.1 R18.1 R20.2 U2.3 | length 2075.6
  Top Layer w8: v1(1000,450) 1072.6,450 R18.1@1080,442.6 ; R20.2@1780,442.6 1847.4,442.6 1860,430 v1(1860,390) ; v1(2410,390) 2410,392.6 R10.1@2460,442.6 2502.6,442.6 2510,450 2510,590 2540.04,620.04 2570.04,620.04 2602.99,652.99 U2.3@2602.99,700
  Bottom Layer w8: v1(1000,450) 1800,450 v1(1860,390) v1(2410,390)
TDI_HARD: JP4.1 R50.1 U7.159 | length 4965.5
  Top Layer w8: v1(620,3680) 620,2497.4 R50.1@680,2437.4 ; U7.159@1597.38,3213.36 1597.38,3297.38 1670,3370 v1(1670,3570)
  Bottom Layer w8: v1(620,3680) 680,3740 1500,3740 v1(1670,3570) 1720,3570 1850,3700 2463.18,3700 2520,3756.82 2596.82,3756.82 2740,3900 3210,3900 3400,3710 3460,3710 3510,3760 JP4.1@3600,3760
TDI_SOFT: JP4.5 R61.1 U7.11 | length 1714.4
  Top Layer w8: U7.11@2646.59,3494.86 2695.14,3494.86 2710,3480 2710,3340 2750,3300 R61.1@2802.6,3300 2800,3297.4 v1(2800,3240)
  Bottom Layer w8: v1(2800,3240) 2860,3300 3720,3300 3760,3340 3760,3480 3730,3510 3650,3510 JP4.5@3600,3560
TDO_B: JP4.2 R10.2 R19.1 | length 5546.2
  Top Layer w8: R19.1@2360,442.6 2402.6,442.6 2410,450 2410,510 2417.4,517.4 R10.2@2460,517.4 v1(2460,600) ; v1(3420,3750) 3380,3710 3380,2200 v1(3460,2120)
  Bottom Layer w8: v1(2460,600) 2620,760 2760,760 2840,840 2910,840 2990,920 3100,920 3160,980 3480,980 3560,1060 3880,1060 3990,1170 3990,1380 4180,1570 4180,1740 3860,2060 3520,2060 v1(3460,2120) ; v1(3420,3750) 3470,3750 3530,3810 3650,3810 JP4.2@3700,3760
TDO_CONTROLLER: R20.1 R50.2 U1.3 U5.17 | length 4115.6
  Top Layer w8: v1(640,720) 580,780 580,1080 600,1100 600,2340 622.6,2362.6 R50.2@680,2362.6 680,2300 740,2240 860,2240 900,2280 900,2497.37 775.76,2621.61 U5.17@710.75,2621.61 ; v1(1130,580) 1160,610 1190,610 1222.99,642.99 U1.3@1222.99,700 ; R20.1@1780,517.4 1822.6,517.4 v1(1860,480)
  Bottom Layer w8: v1(640,720) 990,720 1230,480 v1(1860,480)
TDO_SOFT: R61.2 R66.1 U7.21 | length 858.8
  Top Layer w8: U7.21@2646.59,3691.71 2750.89,3691.71 R66.1@2802.6,3640 2852.6,3590 3010,3590 3040,3560 3040,3320 3020,3300 R61.2@2877.4,3300
TDO_SPARTAN: U5.4 U7.157 | length 1614.7
  Top Layer w8: v1(700,3140) 700,3035.25 812,2923.25 812,2658 848.39,2621.61 U5.4@929.25,2621.61 ; v1(1260,3180) 1300,3140 1540,3140 1558.01,3158.01 U7.157@1558.01,3213.36
  Bottom Layer w8: v1(700,3140) 740,3180 v1(1260,3180)
TMS: R51.2 U1.4 U2.4 | length 4086
  Top Layer w8: v1(640,820) 600,860 600,1060 620,1080 620,1970 960,2310 R51.2@960,2362.6 ; v1(1230,800) 1254.49,775.51 U1.4@1254.49,700 ; U2.4@2634.49,700 2634.49,804.49 v1(2670,840)
  Bottom Layer w8: v1(640,820) 690,770 1100,770 1130,800 v1(1230,800) 1270,760 2390,760 2470,840 v1(2670,840)
TMS_HARD: JP4.4 R51.1 U5.5 U7.2 | length 5309.5
  Top Layer w8: v1(700,3680) 700,3570 740,3530 740,3027.88 828,2939.88 828,2682 862.8,2647.2 982.8,2647.2 1000,2630 1000,2477.4 R51.1@960,2437.4 ; v1(2380,3660) 2380,3510 2572.31,3317.69 U7.2@2646.59,3317.69
  Bottom Layer w8: v1(700,3680) 744,3724 1466,3724 1660,3530 1712.63,3530 1842.63,3660 2460,3660 2538.34,3738.34 2608.34,3738.34 2621.71,3751.71 2750,3880 3200,3880 3400,3680 3480,3680 3510,3710 3650,3710 JP4.4@3700,3660
TMS_SOFT: JP4.8 U7.9 | length 1425.4
  Top Layer w8: v1(2540,3430) 2565.49,3455.49 U7.9@2646.59,3455.49
  Bottom Layer w8: v1(2540,3430) 2600,3430 2744,3574 3416,3574 3580,3410 3650,3410 JP4.8@3700,3460
VCC1_8V: C75.1 C81.2 C84.1 C85.1 C87.1 C93.1 C94.1 C97.2 C99.2 C100.1 C103.1 C110.2 C112.2 C113.1 L12.2 U7.14 U7.28 U7.37 U7.67 U7.76 U7.90 U7.119 U7.128 U7.142 U7.172 U7.186 U7.195 | length 1450.1
  Top Layer w8: U7.142@1473.36,3573.6 1556.4,3573.6 v1(1560,3570) ; U7.128@1473.36,3849.19 1550.81,3849.19 v1(1560,3840) ; U7.119@1473.36,4026.35 1533.65,4026.35 1560,4000 v1(1560,3960) ; U7.90@1833.6,4386.59 1833.6,4306.4 v1(1860,4280) ; U7.172@1853.28,3213.36 1853.28,3283.28 v1(1880,3310) ; v1(2080,4280) 2109.19,4309.19 U7.76@2109.19,4386.59 ; U7.186@2128.87,3213.36 2128.87,3288.87 v1(2150,3310) ; v1(2270,3310) 2306.04,3273.96 U7.195@2306.04,3213.36 ; U7.67@2286.35,4386.59 2286.35,4336.35 2277.94,4327.94 2277.94,4302.06 v1(2300,4280) ; v1(2550,3830) 2550.5,3829.5 U7.28@2646.59,3829.5 ; v1(2550,4010) 2553.33,4006.67 U7.37@2646.59,4006.67 ; v1(2560,3580) 2586.09,3553.91 U7.14@2646.59,3553.91 2738.09,3553.91 2752,3540 C94.1@2802.6,3540
  other v1: 2780,3150 2880,3200
VCC3_3V: C61.1 C62.1 C63.1 C66.1 C70.1 C72.1 C73.1 C74.1 C76.1 C77.1 C82.1 C83.1 C89.1 C90.1 C91.1 C95.1 C98.1 C102.1 C105.1 C107.1 C108.1 C109.1 C111.1 C114.1 L11.2 R70.1 R71.1 R72.1 R73.1 R75.1 R80.1 U4.8 U4.24 U5.18 U5.19 U5.20 U7.13 U7.26 U7.38 U7.53 U7.66 U7.78 U7.91 U7.105 U7.118 U7.130 U7.143 U7.156 U7.171 U7.184 U7.196 U7.208 | length 1925.5
  Top Layer w8: R70.1@680,4577.4 R71.1@780,4577.4 R72.1@880,4577.4 882.6,4580 v1(960,4580) ; C102.1@1297.4,4080 1352,4080 v1(1360,4072) 1385.96,4046.04 U7.118@1473.36,4046.04 ; v1(1380,3480) 1380,3520 1413.91,3553.91 U7.143@1473.36,3553.91 ; v1(1740,3040) 1740,3071.61 1833.6,3165.21 U7.171@1833.6,3213.36 ; 1780,4469.01 1813.91,4435.09 U7.91@1813.91,4386.59 ; U7.66@2306.04,4386.59 2306.04,4436.04 2320,4450 2354,4450 2357,4453 2360,4456 C114.1@2360,4502.6 2402.6,4502.6 2410,4510 2410,4570 2417.4,4577.4 R80.1@2460,4577.4 ; U7.196@2325.72,3213.36 2325.72,3173.81 2450,3049.53 v1(2450,3020) ; U7.38@2646.59,4026.35 2733.73,4026.35 2807.37,4100 v1(2820,4100) ; C107.1@2660,4502.6 R73.1@2760,4502.6 v1(2760,4440) ; v1(2960,4440) R75.1@2960,4502.6
  other v1: 1950,2260 2290,2260 780,2500 2150,2750 3440,2750 3500,2820 3440,2890 3500,2960 2700,3020 3440,3030 2060,3140 1380,3280 2800,3370 1390,3690 2740,3740 1380,4360 2060,4450 2360,4450 1700,4590
VDDA_A: C1.1 C2.1 C13.2 C16.2 C19.2 C25.2 L2.2 U1.7 U1.11 U1.15
  other v1: 840,530 920,530 1000,530 1800,580 1340,600 1500,600 1730,600
VDDA_B: C4.2 C7.2 C9.1 C18.1 C24.2 C26.2 L1.2 U2.7 U2.11 U2.15
  other v1: 3180,460 3180,580 2710,600 2880,600 3110,600
VDDA_E: C38.1 C39.1 C40.1 C41.1 C46.1 C54.1 L6.2 U3.25 U3.28 U3.31 U3.36
  other v1: 3680,1200 3620,1270 4180,1280 3900,1340 4440,1370 4380,1440
VDDD_A: C27.1 C29.1 C31.1 C43.1 C47.1 C48.1 C57.1 C58.1 L9.2 U1.18 U1.25 U1.33 U1.41 U1.57 | length 99.4
  Top Layer w8: v1@1380.47,1230.47 U1.41@1380.47,1329.92
  other v1: 1800,820 980,1020 1800,1060 1380,1230 1800,1340 1700,1420 1020,1780 860,1860 940,1860
VDDD_B: C28.1 C30.1 C35.1 C37.1 C44.1 C50.1 C51.1 C52.1 L8.2 U2.18 U2.25 U2.33 U2.41 U2.57 U2.61 | length 90.5
  Top Layer w8: v1(2760,1240) 2760.47,1240.47 U2.41@2760.47,1329.92 ; U2.18@3090.95,810 U2.18@3091.18,810.24
  other v1: 3170,820 2300,1030 3240,1120 3240,1280 3180,1340 3060,1420 3160,1420
VDDD_E: C45.1 C55.2 C59.2 C60.2 C64.1 C65.2 L10.2 R47.2 R48.2 U3.6 U3.17 U3.20 U3.39
  other v1: 3720,1560 3720,1660 4380,1660 4380,2020 4120,2060 4380,2090
VID_C: JP1.1 R23.2 R25.2 | length 974.8
  Top Layer w8: R23.2@3877.4,992.6 R25.2@3877.4,1100 ; R23.2@3877.4,1000 3880,997.4 v1(3880,930)
  Bottom Layer w8: JP1.1@3720,200 3770,250 3770,400 3880,510 v1(3880,930)
VID_CVBS: C34.1 C36.1 L7.1 R28.2 | length 398.3
  Top Layer w8: R28.2@4337.4,1280 4337.4,1232.6 4417.4,1152.6 C34.1@4417.4,1000 ; L7.1@4417.4,1100 C36.1@4502.6,1100
VID_Y: JP1.3 R24.2 R26.2 | length 1003.1
  Top Layer w8: R24.2@4057.4,997.4 R26.2@4057.4,1100 ; R24.2@4057.4,1000 4060,997.4 v1(4060,930)
  Bottom Layer w8: JP1.3@3820,200 3870,250 3870,360 4010,500 4010,880 v1(4060,930)
WDOG: R59.1 U7.139 | length 2782.6
  Top Layer w8: U7.139@1473.36,3632.65 1572.65,3632.65 v1(1640,3700) ; v1(3420,3880) 3420,3820 3460,3780 3460,3700 3442.6,3682.6 R59.1@3442.6,3220
  Bottom Layer w8: v1(1640,3700) 1680,3740 2430,3740 2480,3790 2580,3790 2608.9,3818.9 2730,3940 3360,3940 v1(3420,3880)
WEBAR: U4.12 U7.192 | length 867.4
  Top Layer w8: U7.192@2246.98,3213.36 2246.98,3150.39 2293,3104.37 2293,2747 2300,2740 2300,2530 2275,2505 U4.12@2275,2378.27
pads on no net: J1.M1 J1.M2 J1.M3 J2.M1 J2.M2 J2.M3 J3.M1 J3.M2 J3.M3 J4.M1 J4.M2 J4.M3 J5.M1 J5.M2 J5.M3 JP2.1 JP3.1 U1.1 U1.14 U1.17 U1.21 U1.22 U1.23 U1.27 U1.30 U1.31 U1.44 U1.45 U1.46 U1.47 U1.48 U1.49 U1.50 U1.51 U1.53 U1.60 U1.64 U2.1 U2.14 U2.17 U2.21 U2.22 U2.23 U2.27 U2.30 U2.31 U2.44 U2.45 U2.46 U2.47 U2.48 U2.49 U2.50 U2.51 U2.53 U2.60 U2.64 U3.1 U3.34 U3.37 U3.43 U5.2 U5.9 U5.12 U5.13 U5.14 U5.15 U5.16 U7.3 U7.4 U7.5 U7.6 U7.7 U7.8 U7.15 U7.16 U7.17 U7.18 U7.20 U7.22 U7.23 U7.24 U7.27 U7.29 U7.56 U7.57 U7.58 U7.59 U7.64 U7.68 U7.69 U7.70 U7.82 U7.83 U7.84 U7.86 U7.87 U7.88 U7.89 U7.93 U7.94 U7.95 U7.96 U7.97 U7.98 U7.127 U7.129 U7.132 U7.133 U7.134 U7.135 U7.136 U7.138 U7.141 U7.145 U7.146 U7.147 U7.148 U7.149 U7.150 U7.151 U7.152 U7.154 U7.160 U7.161 U7.175 U7.204 U7.205 U7.206 U7.FID1 U7.FID2

## Polygon pours and split planes (outlines as drawn)
VCC3_3V on Top Layer "Top Layer-VCC3_3V" (solid, remove dead copper, pour order 1000): 23 vertices, not listed, extent 1905.67,2225.67 2344.33,2424.33
VCC3_3V on Top Layer "Top Layer-VCC3_3V 1" (solid, remove dead copper, pour order 1001): 25 vertices, not listed, extent 1969.67,2615.67 2231.33,2854.33
VCC3_3V on Top Layer "Top Layer-VCC3_3V 2" (solid, remove dead copper, pour order 1002): 19 vertices, not listed, extent 618.27,2405.67 884.33,2604.33
VCC3_3V on Top Layer "Top Layer-VCC3_3V 3" (solid, remove dead copper, pour order 1003): 2103.06,4533.06 2104.33,4530 2104.33,4360 2103.06,4356.94 2100,4355.67 2010.76,4355.67 2007.7,4356.94 2006.43,4360 2006.43,4447.44 1956.94,4496.94 1955.67,4500 1955.67,4530 1956.94,4533.06 1960,4534.33 2100,4534.33
VCC3_3V on Top Layer "Top Layer-VCC3_3V 4" (solid, remove dead copper, pour order 1004): 21 vertices, not listed, extent 2275.67,4345.67 2544.33,4604.33
VCC3_3V on Top Layer "Top Layer-VCC3_3V 5" (solid, remove dead copper, pour order 1005): 23 vertices, not listed, extent 2605.67,4005.67 2914.33,4194.33
VCC3_3V on Top Layer "Top Layer-VCC3_3V 6" (solid, remove dead copper, pour order 1006): 17 vertices, not listed, extent 2615.67,3665.67 2834.33,3814.33
VCC3_3V on Top Layer "Top Layer-VCC3_3V 7" (solid, remove dead copper, pour order 1007): 27 vertices, not listed, extent 2615.67,3295.67 2834.33,3558.24
VCC3_3V on Top Layer "Top Layer-VCC3_3V 8" (solid, remove dead copper, pour order 1008): 17 vertices, not listed, extent 2459.19,2925.67 2777.83,3254.33
VCC3_3V on Top Layer "Top Layer-VCC3_3V 9" (solid, remove dead copper, pour order 1009): 22 vertices, not listed, extent 2305.67,2925.67 2549.24,3254.33
VCC3_3V on Top Layer "Top Layer-VCC3_3V 10" (solid, remove dead copper, pour order 1010): 2103.06,3243.06 2104.33,3240 2104.33,3050 2103.06,3046.94 2100,3045.67 1974,3045.67 1970.94,3046.94 1969.67,3050 1969.67,3106.12 1970.94,3109.18 2026.12,3164.36 2026.12,3240 2027.39,3243.06 2030.45,3244.33 2100,3244.33
VCC3_3V on Top Layer "Top Layer-VCC3_3V 11" (solid, remove dead copper, pour order 1011): 25 vertices, not listed, extent 1685.67,2945.67 1844.33,3244.33
VCC3_3V on Top Layer "Top Layer-VCC3_3V 12" (solid, remove dead copper, pour order 1012): 20 vertices, not listed, extent 1285.67,3225.67 1504.33,3344.33
VCC3_3V on Top Layer "Top Layer-VCC3_3V 13" (solid, remove dead copper, pour order 1013): 1503.06,3576.66 1504.33,3573.6 1504.33,3357.06 1503.06,3354 1500,3352.73 1310.75,3352.73 1307.69,3354 1286.94,3374.75 1285.67,3377.82 1285.67,3480 1285.67,3573.6 1286.94,3576.66 1290,3577.93 1500,3577.93
VCC3_3V on Top Layer "Top Layer-VCC3_3V 14" (solid, remove dead copper, pour order 1014): 19 vertices, not listed, extent 1285.67,3645.67 1504.33,3840.33
VCC3_3V on Top Layer "Top Layer-VCC3_3V 15" (solid, remove dead copper, pour order 1015): 21 vertices, not listed, extent 1285.67,4245.67 1517.59,4454.33
VCC3_3V on Top Layer "Top Layer-VCC3_3V 16" (solid, remove dead copper, pour order 1016): 22 vertices, not listed, extent 1635.67,4345.67 1834.33,4634.33
VCC1_8V on Top Layer "Top Layer-VCC1_8V" (solid, remove dead copper, pour order 1017): 1923.06,4533.06 2013.83,4442.3 2015.09,4439.24 2015.09,4360 2013.83,4356.94 2010.76,4355.67 1830,4355.67 1826.94,4356.94 1825.67,4360 1825.67,4530 1826.94,4533.06 1830,4534.33 1920,4534.33
VCC1_8V on Top Layer "Top Layer-VCC1_8V 1" (solid, remove dead copper, pour order 1018): 2293.06,4533.06 2294.33,4530 2294.33,4360 2293.06,4356.94 2290,4355.67 2100,4355.67 2096.94,4356.94 2095.67,4360 2095.67,4530 2096.94,4533.06 2100,4534.33 2290,4534.33
VCC1_8V on Top Layer "Top Layer-VCC1_8V 2" (solid, remove dead copper, pour order 1019): 20 vertices, not listed, extent 2615.67,3982.65 2914.33,4074.33
VCC1_8V on Top Layer "Top Layer-VCC1_8V 3" (solid, remove dead copper, pour order 1020): 17 vertices, not listed, extent 2615.67,3805.67 2834.33,3894.33
VCC1_8V on Top Layer "Top Layer-VCC1_8V 4" (solid, remove dead copper, pour order 1021): 17 vertices, not listed, extent 2605.67,3505.67 2834.33,3604.33
VCC1_8V on Top Layer "Top Layer-VCC1_8V 5" (solid, remove dead copper, pour order 1022): 22 vertices, not listed, extent 2282.02,2925.67 2414.33,3244.33
VCC1_8V on Top Layer "Top Layer-VCC1_8V 6" (solid, remove dead copper, pour order 1023): 2153.06,3253.06 2154.33,3250 2154.33,3158.66 2174.01,3138.97 2175.28,3135.91 2175.28,3050 2174.01,3046.94 2170.95,3045.67 2110,3045.67 2106.94,3046.94 2105.67,3050 2105.67,3250 2106.94,3253.06 2110,3254.33 2150,3254.33
VCC1_8V on Top Layer "Top Layer-VCC1_8V 7" (solid, remove dead copper, pour order 1024): 22 vertices, not listed, extent 1785.67,2945.67 1877.3,3244.33
VCC1_8V on Top Layer "Top Layer-VCC1_8V 8" (solid, remove dead copper, pour order 1025): 1503.06,3653.06 1504.33,3650 1504.33,3570 1503.06,3566.94 1500,3565.67 1401.79,3565.67 1383.06,3546.94 1380,3545.67 1290,3545.67 1286.94,3546.94 1285.67,3550 1285.67,3650 1286.94,3653.06 1290,3654.33 1500,3654.33
VCC1_8V on Top Layer "Top Layer-VCC1_8V 9" (solid, remove dead copper, pour order 1026): 23 vertices, not listed, extent 1285.67,3745.67 1504.33,3911.7
VDDA_E on Top Layer "Top Layer-VDDA_E" (solid, remove dead copper, pour order 1027): 3723.06,1313.06 3724.33,1310 3724.33,1110 3723.06,1106.94 3683.06,1066.94 3680,1065.67 3580,1065.67 3576.94,1066.94 3575.67,1070 3575.67,1280 3576.94,1283.06 3606.94,1313.06 3610,1314.33 3720,1314.33
VDDA_E on Top Layer "Top Layer-VDDA_E 1" (solid, remove dead copper, pour order 1028): 36 vertices, not listed, extent 4121.18,1195.67 4504.33,1614.33
VDDA_E on Top Layer "Top Layer-VDDA_E 2" (solid, remove dead copper, pour order 1029): 26 vertices, not listed, extent 3845.67,1195.67 4034.33,1484.33
VDDA_E on Top Layer "Top Layer-VDDA_E 3" (solid, remove dead copper, pour order 1030): 23 vertices, not listed, extent 4025.67,1215.67 4214.33,1484.33
VDDD_E on Top Layer "Top Layer-VDDD_E" (solid, remove dead copper, pour order 1031): 43 vertices, not listed, extent 4255.67,1625.67 4584.33,2214.33
VDDD_E on Top Layer "Top Layer-VDDD_E 1" (solid, remove dead copper, pour order 1032): 18 vertices, not listed, extent 4025.67,1875.67 4160.58,2124.33
VDDD_E on Top Layer "Top Layer-VDDD_E 2" (solid, remove dead copper, pour order 1033): 23 vertices, not listed, extent 3495.67,1345.67 3864.33,1714.33
VDDD_B on Top Layer "Top Layer-VDDD_B" (solid, remove dead copper, pour order 1034): 17 vertices, not listed, extent 2227.75,855.67 2504.33,1064.33
VDDD_B on Top Layer "Top Layer-VDDD_B 1" (solid, remove dead copper, pour order 1035): 32 vertices, not listed, extent 2625.67,1295.67 2774.33,1514.33
VDDD_B on Top Layer "Top Layer-VDDD_B 2" (solid, remove dead copper, pour order 1036): 38 vertices, not listed, extent 2975.67,871.5 3294.33,1514.33
VDDD_B on Top Layer "Top Layer-VDDD_B 3" (solid, remove dead copper, pour order 1037): 3273.06,912.96 3274.33,909.9 3274.33,770 3273.06,766.94 3270,765.67 3050,765.67 3046.94,766.94 3045.67,770 3045.67,870 3046.94,873.06 3050,874.33 3174.03,874.33 3212.66,912.96 3215.72,914.23 3270,914.23
VDDA_B on Top Layer "Top Layer-VDDA_B" (solid, remove dead copper, pour order 1038): 47 vertices, not listed, extent 2882.13,305.67 3394.33,744.33
VDDA_A on Top Layer "Top Layer-VDDA_A" (solid, remove dead copper, pour order 1039): 19 vertices, not listed, extent 1175.67,505.67 1384.33,744.33
VDDA_B on Top Layer "Top Layer-VDDA_B 1" (solid, remove dead copper, pour order 1040): 22 vertices, not listed, extent 2819.14,505.67 3064.33,744.33
VDDA_B on Top Layer "Top Layer-VDDA_B 2" (solid, remove dead copper, pour order 1041): 19 vertices, not listed, extent 2555.67,505.67 2764.33,744.33
VDDD_A on Top Layer "Top Layer-VDDD_A" (solid, remove dead copper, pour order 1042): 1873.06,1123.06 1893.06,1103.06 1894.33,1100 1894.33,1060 1894.33,980 1894.33,880 1893.06,876.94 1890,875.67 1670,875.67 1666.94,876.94 1665.67,880 1665.67,1120 1666.94,1123.06 1670,1124.33 1870,1124.33
VDDD_A on Top Layer "Top Layer-VDDD_A 1" (solid, remove dead copper, pour order 1043): 17 vertices, not listed, extent 1665.67,765.67 1894.33,902.49
VDDD_A on Top Layer "Top Layer-VDDD_A 2" (solid, remove dead copper, pour order 1044): 17 vertices, not listed, extent 1615.67,1285.67 1894.33,1514.33
VDDD_A on Top Layer "Top Layer-VDDD_A 3" (solid, remove dead copper, pour order 1045): 19 vertices, not listed, extent 765.67,1685.67 1064.33,1924.33
VDDD_A on Top Layer "Top Layer-VDDD_A 4" (solid, remove dead copper, pour order 1046): 22 vertices, not listed, extent 1245.67,1285.67 1447.79,1514.33
VDDD_A on Top Layer "Top Layer-VDDD_A 5" (solid, remove dead copper, pour order 1047): 1123.06,1053.06 1124.33,1050 1124.33,930 1123.06,926.94 1120,925.67 880,925.67 876.94,926.94 856.94,946.94 855.67,950 855.67,1030 856.94,1033.06 876.94,1053.06 880,1054.33 1120,1054.33
VDDA_A on Top Layer "Top Layer-VDDA_A 1" (solid, remove dead copper, pour order 1048): 23 vertices, not listed, extent 835.67,925.67 1124.33,1054.33
VDDA_A on Top Layer "Top Layer-VDDA_A 2" (solid, remove dead copper, pour order 1049): 24 vertices, not listed, extent 1449.14,505.67 1684.33,744.33
VDDA_A on Top Layer "Top Layer-VDDA_A 3" (solid, remove dead copper, pour order 1050): 31 vertices, not listed, extent 1555.67,495.67 1894.33,744.33
VDDA_A on Top Layer "Top Layer-VDDA_A 4" (solid, remove dead copper, pour order 1051): 1043.06,563.06 1044.33,560 1044.33,310 1043.06,306.94 1040,305.67 750,305.67 746.94,306.94 745.67,310 745.67,560 746.94,563.06 750,564.33 1040,564.33
POS3_3V on Top Layer "Top Layer-POS3_3V" (solid, remove dead copper, pour order 1052): 714.65,2031.47 813.06,1933.06 814.33,1930 813.06,1926.94 764.33,1878.21 764.33,1690 763.06,1686.94 760,1685.67 643.18,1685.67 640.12,1686.94 638.85,1690 638.85,1960 640.12,1963.06 708.53,2031.47 711.59,2032.74
POS3_3V on Top Layer "Top Layer-POS3_3V 1" (solid, remove dead copper, pour order 1053): 753.06,563.06 754.33,560 754.33,310 753.06,306.94 750,305.67 660,305.67 656.94,306.94 636.94,326.94 635.67,330 635.67,540 636.94,543.06 656.94,563.06 660,564.33 750,564.33
POS3_3V on Top Layer "Top Layer-POS3_3V 2" (solid, remove dead copper, pour order 1054): 3543.06,293.06 3544.33,290 3544.33,180 3543.06,176.94 3523.06,156.94 3520,155.67 3340,155.67 3336.94,156.94 3316.94,176.94 3315.67,180 3315.67,290 3316.94,293.06 3320,294.33 3540,294.33
POS3_3V on Top Layer "Top Layer-POS3_3V 3" (solid, remove dead copper, pour order 1055): 20 vertices, not listed, extent 3435.67,835.67 3574.33,1134.33
VCC1_8V on Top Layer "Top Layer-VCC1_8V 10" (solid, remove dead copper, pour order 1056): 28 vertices, not listed, extent 2698.37,2865.67 2934.33,3264.33
VCC1_8V on Top Layer "Top Layer-VCC1_8V 11" (solid, remove dead copper, pour order 1057): 20 vertices, not listed, extent 1265.67,3905.67 1504.33,4034.33
VCC3_3V on Top Layer "Top Layer-VCC3_3V 17" (solid, remove dead copper, pour order 1058): 19 vertices, not listed, extent 1265.67,4041.71 1504.33,4134.33
VCC3_3V on Top Layer "Top Layer-VCC3_3V 18" (solid, remove dead copper, pour order 1059): 2793.06,4533.06 2794.33,4530 2794.33,4400 2793.06,4396.94 2753.06,4356.94 2750,4355.67 2550,4355.67 2546.94,4356.94 2545.67,4360 2545.67,4530 2546.94,4533.06 2550,4534.33 2790,4534.33
POS5V on Top Layer "Top Layer-POS5V" (solid, remove dead copper, pour order 1060): 26 vertices, not listed, extent 3495.67,3815.67 3724.33,4074.33
PWR_IN on Top Layer "Top Layer-PWR_IN" (solid, remove dead copper, pour order 1061): 18 vertices, not listed, extent 3905.67,4065.67 4314.33,4304.33
NetC96_1 on Top Layer "Top Layer-NetC96_1" (solid, remove dead copper, pour order 1062): 33 vertices, not listed, extent 3585.67,3845.42 4594.33,4224.33
POS1_8V on Top Layer "Top Layer-POS1_8V" (solid, remove dead copper, pour order 1063): 17 vertices, not listed, extent 4085.67,3415.67 4594.33,3834.33
NetC79_1 on Top Layer "Top Layer-NetC79_1" (solid, remove dead copper, pour order 1064): 21 vertices, not listed, extent 3765.67,2725.67 4594.33,3044.33
POS1_8V on Top Layer "Top Layer-POS1_8V 1" (solid, remove dead copper, pour order 1065): 3063.06,2933.06 3064.33,2930 3064.33,2790 3063.06,2786.94 2943.06,2666.94 2940,2665.67 2936.94,2666.94 2906.94,2696.94 2905.67,2700 2905.67,2800 2905.67,2930 2906.94,2933.06 2910,2934.33 3060,2934.33
POS5V on Top Layer "Top Layer-POS5V 1" (solid, remove dead copper, pour order 1066): 3753.06,3113.06 3754.33,3110 3754.33,2830 3753.06,2826.94 3750,2825.67 3620,2825.67 3616.94,2826.94 3576.94,2866.94 3575.67,2870 3575.67,3080 3576.94,3083.06 3606.94,3113.06 3610,3114.33 3750,3114.33
VCC3_3V on Top Layer "Top Layer-VCC3_3V 19" (solid, remove dead copper, pour order 1067): 3513.06,3073.06 3533.06,3053.06 3534.33,3050 3534.33,2420 3534.33,2370 3533.06,2366.94 3530,2365.67 3390,2365.67 3386.94,2366.94 3385.67,2370 3385.67,3070 3386.94,3073.06 3390,3074.33 3510,3074.33
POS3_3V on Top Layer "Top Layer-POS3_3V 4" (solid, remove dead copper, pour order 1068): 3333.06,1733.06 3443.06,1623.06 3444.33,1620 3444.33,1530 3443.06,1526.94 3440,1525.67 3210,1525.67 3206.94,1526.94 3205.67,1530 3205.67,1620 3206.94,1623.06 3210,1624.33 3218.21,1624.33 3326.94,1733.06 3330,1734.33
POS3_3V on Top Layer "Top Layer-POS3_3V 5" (solid, remove dead copper, pour order 1069): 29 vertices, not listed, extent 3545.67,2155.67 4594.33,2864.33
POS3_3V on Top Layer "Top Layer-POS3_3V 6" (solid, remove dead copper, pour order 1070): 25 vertices, not listed, extent 3755.67,3085.67 4194.33,3214.33
GND on Top Layer "Top Layer-GND" (solid, remove dead copper, pour order 1071): 4673.06,4673.06 4674.33,4670 4674.33,50 4673.06,46.94 4670,45.67 50,45.67 46.94,46.94 45.67,50 45.67,4670 46.94,4673.06 50,4674.33 4670,4674.33
VCC3_3V on MidLayer1 "MidLayer1-VCC3_3V" (solid, remove dead copper, pour order 1072): 60 vertices, not listed, extent 655.67,2215.67 3574.33,4634.33
POS3_3V on MidLayer1 "MidLayer1-POS3_3V" (solid, remove dead copper, pour order 1073): 82 vertices, not listed, extent 195.67,155.67 4574.33,3944.33
VDDD_A on MidLayer1 "MidLayer1-VDDD_A" (solid, remove dead copper, pour order 1074): 19 vertices, not listed, extent 795.67,775.67 1904.33,1944.33
VDDA_A on MidLayer1 "MidLayer1-VDDA_A" (solid, remove dead copper, pour order 1075): 23 vertices, not listed, extent 791.67,455.67 1844.33,664.33
VDDA_B on MidLayer1 "MidLayer1-VDDA_B" (solid, remove dead copper, pour order 1076): 20 vertices, not listed, extent 2635.67,395.67 3264.33,664.33
VDDD_B on MidLayer1 "MidLayer1-VDDD_B" (solid, remove dead copper, pour order 1077): 19 vertices, not listed, extent 2235.67,775.67 3304.33,1504.33
VDDA_E on MidLayer1 "MidLayer1-VDDA_E" (solid, remove dead copper, pour order 1078): 19 vertices, not listed, extent 3555.67,1135.67 4504.33,1504.33
VDDD_E on MidLayer1 "MidLayer1-VDDD_E" (solid, remove dead copper, pour order 1079): 18 vertices, not listed, extent 3555.67,1515.67 4444.33,2144.33
VCC1_8V on MidLayer1 "MidLayer1-VCC1_8V" (solid, remove dead copper, pour order 1080): 27 vertices, not listed, extent 1455.67,3075.67 2944.33,4364.33
POS5V on MidLayer1 "MidLayer1-POS5V" (solid, remove dead copper, pour order 1081): 22 vertices, not listed, extent 3205.67,2815.67 3884.33,4644.33
GND on MidLayer1 "MidLayer1-GND" (solid, remove dead copper, pour order 1082): 4673.06,4673.06 4674.33,4670 4674.33,50 4673.06,46.94 4670,45.67 50,45.67 46.94,46.94 45.67,50 45.67,4670 46.94,4673.06 50,4674.33 4670,4674.33
GND on Bottom Layer "Bottom Layer-GND" (solid, remove dead copper, pour order 1083): 4673.06,4673.06 4674.33,4670 4674.33,50 4673.06,46.94 4670,45.67 50,45.67 46.94,46.94 45.67,50 45.67,4670 46.94,4673.06 50,4674.33 4670,4674.33
POS1_8V on Bottom Layer "Bottom Layer-POS1_8V" (solid, remove dead copper, pour order 1084): 25 vertices, not listed, extent 2735.67,2645.67 4584.33,3864.33
PWR_IN on Bottom Layer "Bottom Layer-PWR_IN" (solid, remove dead copper, pour order 1085): 18 vertices, not listed, extent 3435.67,3995.67 4224.33,4564.33
GND on Ground (split plane): 4704.31,20.1 20.1,20.1 20.1,4704.31 4704.31,4704.31

## Keep-outs
Keep-Out Layer:
  lines w11.81: 51.18,51.18 4673.23,51.18 4673.23,4673.23 51.18,4673.23 51.18,51.18

## Silkscreen, mask and mechanical layers (free items; w line width, h text height)
Top Overlay:
  lines w8: 4190,1135.43 4190,1180
  lines w10: 1560,4640 1730,4640 ; 1710,4620 1730,4640 ; 1710,4660 1730,4640
  text "Altium" at 750,3120 h80
  text "Video" at 750,2990 h80
  text "Multiplexer" at 750,2860 h80
  text "PCB Rev B" at 3580,704 h50
  text "16-Jan-2004" at 3580,608 h50

## Text inside footprints (layer, text, board x,y; h text height)
JP1: Top Overlay "2" at 3620,280 h50; Top Overlay "1" at 3640,180 h50; Top Overlay "7" at 4080,180 h50; Top Overlay "8" at 4080,280 h50
JP2: Top Overlay "2" at 860,2150 h50; Top Overlay "1" at 860,2050 h50; Top Overlay "19" at 1920,2050 h50; Top Overlay "20" at 1820,2230 h50
JP3: Top Overlay "2" at 2260,2150 h50; Top Overlay "1" at 2260,2050 h50; Top Overlay "19" at 3320,2050 h50; Top Overlay "20" at 3320,2150 h50
JP4: Top Overlay "2" at 3680,3860 h50 r270; Top Overlay "1" at 3580,3840 h50 r270; Top Overlay "9" at 3580,3300 h50 r270; Top Overlay "10" at 3680,3300 h50 r270
U1: Top Overlay "1" at 1144.25,621.26 h24 r90; Top Overlay "16" at 1663.94,605.51 h24 r90; Top Overlay "17" at 1805.67,774.8 h24 r180; Top Overlay "32" at 1805.67,1284.65 h24 r180; Top Overlay "33" at 1663.94,1388.98 h24 r90; Top Overlay "48" at 1144.25,1388.98 h24 r90; Top Overlay "49" at 1022.2,1282.68 h24 r180; Top Overlay "64" at 1022.2,762.99 h24 r180
U2: Top Overlay "1" at 2524.25,621.26 h24 r90; Top Overlay "16" at 3043.94,605.51 h24 r90; Top Overlay "17" at 3185.67,774.8 h24 r180; Top Overlay "32" at 3185.67,1284.65 h24 r180; Top Overlay "33" at 3043.94,1388.98 h24 r90; Top Overlay "48" at 2524.25,1388.98 h24 r90; Top Overlay "49" at 2402.2,1282.68 h24 r180; Top Overlay "64" at 2402.2,762.99 h24 r180
U3: Top Overlay "44" at 4353.86,1845.2 h24; Top Overlay "34" at 4357.8,1498.74 h24; Top Overlay "11" at 3881.42,2018.43 h24 r270; Top Overlay "1" at 4220,1998.74 h24 r270; Top Overlay "22" at 3731.81,1502.68 h24; Top Overlay "12" at 3731.81,1845.2 h24; Top Overlay "33" at 4220,1392.44 h24 r270; Top Overlay "23" at 3881.42,1388.5 h24 r270